# EAGLE board DualPanningMixer (EAGLE 9.5.2)
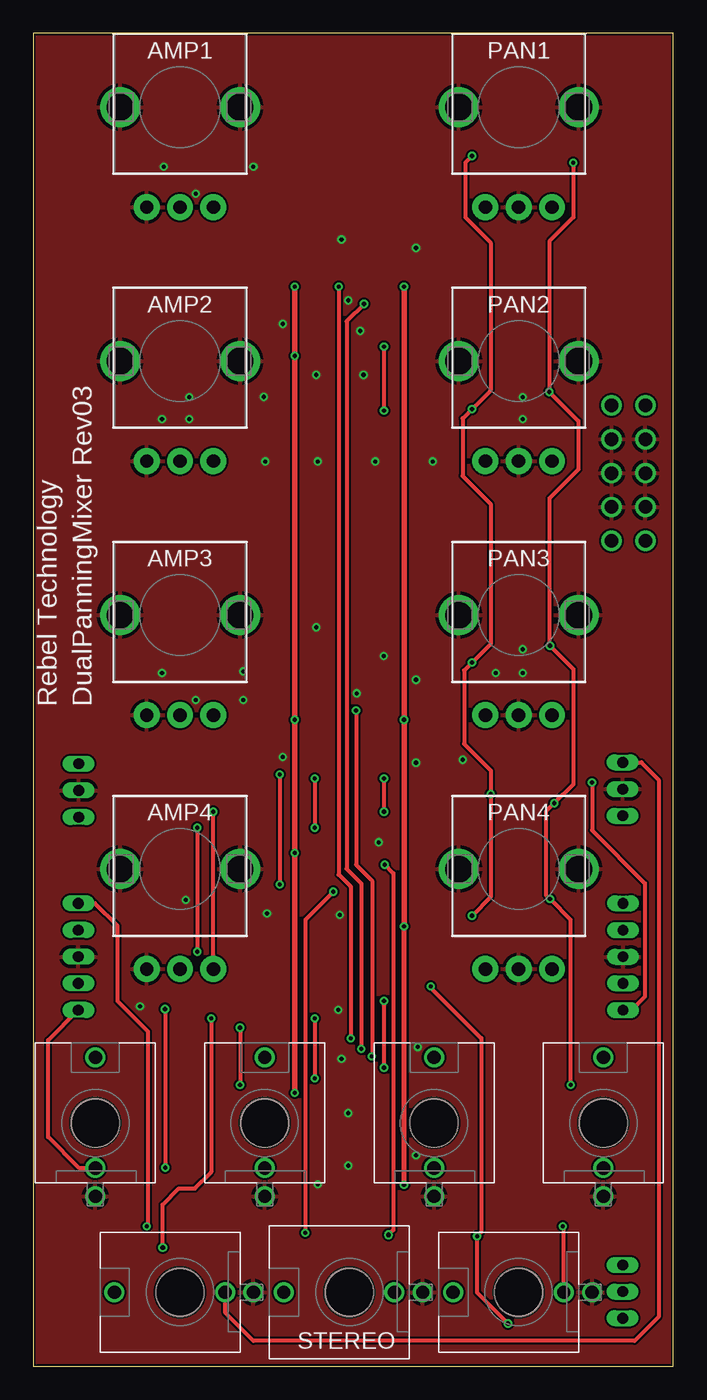
[diagram p0: board, top side]
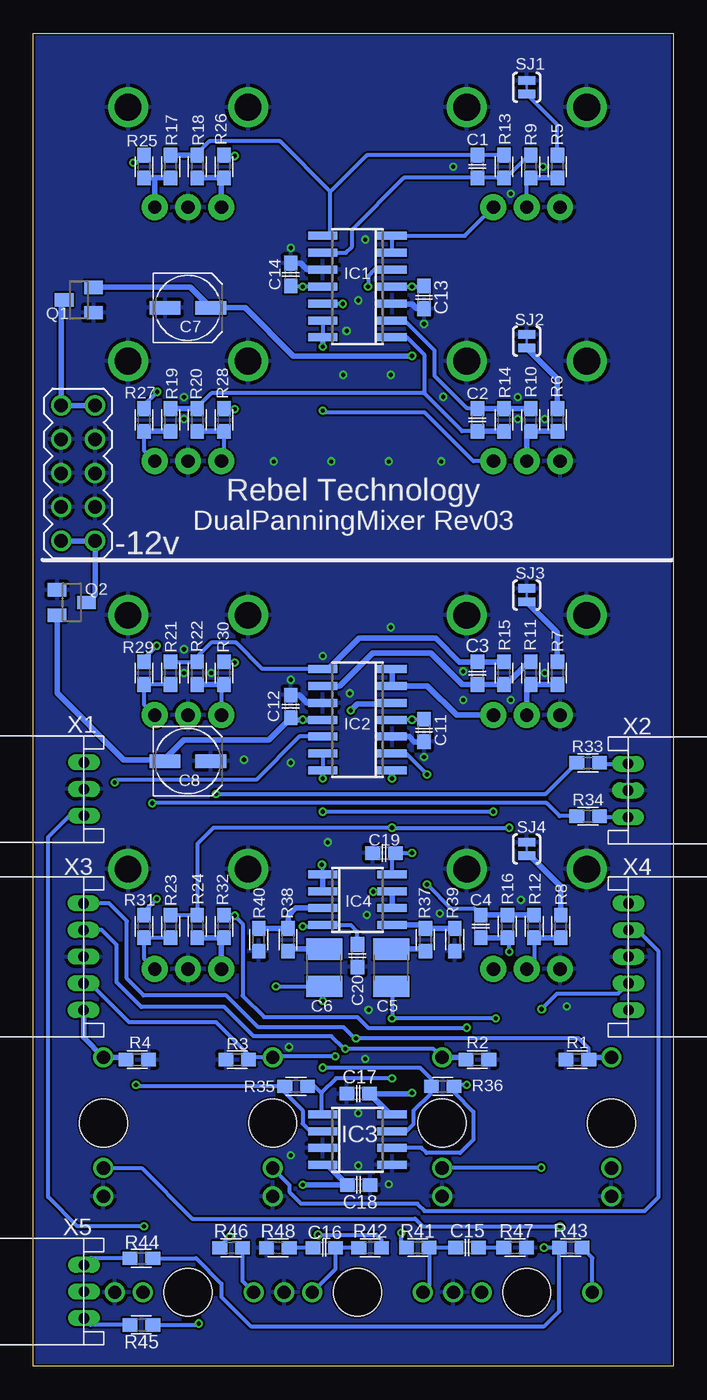
[diagram p1: board, bottom side, seen from below]

Size 48 x 100 mm. Coordinates in mm from the lower left corner, seen from the top.
Outline: 0,0 48,0 48,100 0,100 0,0
Copper layers (1*16): Top 0.035mm / dielectric 1.5mm / Bottom 0.035mm
Design rules "SparkFun-2-layer-PCBWay-LIMIT": minimum track width 6mil, minimum drill 0.3mm, track to track 6mil, track to pad 6mil, pad to pad 6mil, via to via 6mil, smd to smd 0mil, copper to edge 6mil, drill to drill 6mil, minimum pad ring 6mil, minimum via ring 6mil, stop-mask expansion 4mil, vias tented up to drill 25mil, thermal gap 10mil

## Footprints (pad centres in the part's own frame; a part is rotated, then mirrored left to right if it is on the bottom)
POT-ALPS-RK09L1140 = drill 1 pad 1.93: 1 -2.5,-7.5; 2 0,-7.5; 3 2.5,-7.5 | drill 2: P$5 -4.5,0; P$6 4.5,0
C0603 = smd 1.1 x 1: 1 -0.85,0; 2 0.85,0
C1210 = smd 1.6 x 2.7: 1 -1.4,0; 2 1.4,0
UD-5X5,8_NICHICON = smd 2.3 x 1: + 1.725,0; - -1.7,0
SO14 = smd 0.6 x 2.2: 1 -3.81,-2.6; 2 -2.54,-2.6; 3 -1.27,-2.6; 4 0,-2.6; 5 1.27,-2.6; 6 2.54,-2.6; 7 3.81,-2.6; 8 3.81,2.6; 9 2.54,2.6; 10 1.27,2.6; 11 0,2.6; 12 -1.27,2.6; 13 -2.54,2.6; 14 -3.81,2.6
SO08 = smd 0.6 x 2.2: 1 -1.905,-2.6; 2 -0.635,-2.6; 3 0.635,-2.6; 4 1.905,-2.6; 5 1.905,2.6; 6 0.635,2.6; 7 -0.635,2.6; 8 -1.905,2.6
THONKICONN = drill 1: P$1 0,-5.5; P$2 0,-3.38; P$3 0,4.92 | hole 3.6: 0,0
THONKICONN_STEREO = drill 1: P$1 0,-5.5; P$2 0,-3.38; P$3 0,4.92 | hole 3.6: 0,0
SOT23 = smd 1 x 1.4: 1 -0.95,-1.1; 2 0.95,-1.1; 3 0,1.1
0603 = smd 1.1 x 1: 1 -0.85,0; 2 0.85,0
SJ_2S-TRACE = smd 0.635 x 1.27: 1 -0.508,0; 2 0.508,0
MA05-2 = drill 1.016: 1 -5.08,-1.27; 2 -5.08,1.27; 3 -2.54,-1.27; 4 -2.54,1.27; 5 0,-1.27; 6 0,1.27; 7 2.54,-1.27; 8 2.54,1.27; 9 5.08,-1.27; 10 5.08,1.27
CON-JST_PH_3W = drill 0.8 long: P1 0,0; P2 -2,0; P3 -4,0
CON-JST_PH_5W = drill 0.8 long: P1 0,0; P2 -2,0; P3 -4,0; P4 -6,0; P5 -8,0

## Placement (x,y rotation side)
AMP1  POT-ALPS-RK09L1140  [POT-ALPS-RK09L1140]  11,94.45 0 top
AMP2  POT-ALPS-RK09L1140  [POT-ALPS-RK09L1140]  11,75.4 0 top
AMP3  POT-ALPS-RK09L1140  [POT-ALPS-RK09L1140]  11,56.35 0 top
AMP4  POT-ALPS-RK09L1140  [POT-ALPS-RK09L1140]  11,37.3 0 top
C1  10p  [C0603]  14.7,90 270 bottom
C2  10p  [C0603]  14.7,71 90 bottom
C3  10p  [C0603]  14.7,52 270 bottom
C4  10p  [C0603]  14.45,33 90 bottom
C5  1u Polyester  [C1210]  21.17,29.9 90 bottom
C6  1u Polyester  [C1210]  26.2,29.9 90 bottom
C7  47u  [UD-5X5,8_NICHICON]  36.42,79.4 0 bottom
C8  47u  [UD-5X5,8_NICHICON]  36.42,45.4 0 bottom
C11  100n  [C0603]  18.7,47.7 90 bottom
C12  100n  [C0603]  28.7,49.5 270 bottom
C13  100n  [C0603]  18.7,80.2 90 bottom
C14  100n  [C0603]  28.7,81.9 270 bottom
C15  47n  [C0603]  15.46,8.9 0 bottom
C16  47n  [C0603]  26.18,8.88 180 bottom
C17  100n  [C0603]  23.63,20.45 0 bottom
C18  100n  [C0603]  23.6,13.6 180 bottom
C19  100n  [C0603]  21.7,38.5 180 bottom
C20  100n  [C0603]  23.7,30.8 270 bottom
IC1  TL074  [SO14]  23.7,81 90 bottom
IC2  TL074  [SO14]  23.7,48.5 90 bottom
IC3  TL072  [SO08]  23.7,17 270 bottom
IC4  OPA1678  [SO08]  23.7,35 270 bottom
IN1  THONKICONN  [THONKICONN]  4.65,18.25 0 top
IN2  THONKICONN  [THONKICONN]  17.35,18.25 0 top
IN3  THONKICONN  [THONKICONN]  30.05,18.25 0 top
IN4  THONKICONN  [THONKICONN]  42.75,18.25 0 top
OUTHP  THONKICONN_STEREO  [THONKICONN_STEREO]  23.7,5.55 90 top
OUTL  THONKICONN  [THONKICONN]  11,5.55 90 top
OUTR  THONKICONN  [THONKICONN]  36.4,5.55 90 top
PAN1  POT-ALPS-RK09L1140  [POT-ALPS-RK09L1140]  36.4,94.45 0 top
PAN2  POT-ALPS-RK09L1140  [POT-ALPS-RK09L1140]  36.4,75.4 0 top
PAN3  POT-ALPS-RK09L1140  [POT-ALPS-RK09L1140]  36.4,56.35 0 top
PAN4  POT-ALPS-RK09L1140  [POT-ALPS-RK09L1140]  36.4,37.3 0 top
Q1  BSS84  [SOT23]  44.58,80 90 bottom
Q2  BSS123  [SOT23]  45.12,57.3 270 bottom
R1  1M  [0603]  7.2,23 0 bottom
R2  1M  [0603]  14.7,23 180 bottom
R3  1M  [0603]  32.7,23 0 bottom
R4  1M  [0603]  40.2,23 180 bottom
R5  2k7  [0603]  8.7,90 270 bottom
R6  2k7  [0603]  8.7,71 270 bottom
R7  2k7  [0603]  8.7,52 270 bottom
R8  2k7  [0603]  8.45,33 270 bottom
R9  10k  [0603]  10.7,90 90 bottom
R10  10k  [0603]  10.7,71 90 bottom
R11  10k  [0603]  10.7,52 90 bottom
R12  10k  [0603]  10.45,33 90 bottom
R13  22k  [0603]  12.7,90 90 bottom
R14  22k  [0603]  12.7,71 270 bottom
R15  22k  [0603]  12.7,52 90 bottom
R16  22k  [0603]  12.45,33 270 bottom
R17  10k  [0603]  37.7,90 90 bottom
R18  10k  [0603]  35.7,90 90 bottom
R19  10k  [0603]  37.7,71 90 bottom
R20  10k  [0603]  35.7,71 90 bottom
R21  10k  [0603]  37.7,52 90 bottom
R22  10k  [0603]  35.7,52 90 bottom
R23  10k  [0603]  37.7,33 90 bottom
R24  10k  [0603]  35.7,33 90 bottom
R25  10k  [0603]  39.7,90 270 bottom
R26  10k  [0603]  33.7,90 270 bottom
R27  10k  [0603]  39.7,71 270 bottom
R28  10k  [0603]  33.7,71 270 bottom
R29  10k  [0603]  39.7,52 270 bottom
R30  10k  [0603]  33.7,52 270 bottom
R31  10k  [0603]  39.7,33 270 bottom
R32  10k  [0603]  33.7,33 270 bottom
R33  18k  [0603]  6.4,45.26 180 bottom
R34  18k  [0603]  6.4,41.26 180 bottom
R35  22k  [0603]  28.3,21 0 bottom
R36  22k  [0603]  17.3,21 180 bottom
R37  2k  [0603]  18.6,32 270 bottom
R38  2k  [0603]  28.9,32 270 bottom
R39  1k  [0603]  16.4,32 90 bottom
R40  1k  [0603]  31.1,32 90 bottom
R41  10R  [0603]  19.16,8.9 180 bottom
R42  10R  [0603]  22.74,8.88 0 bottom
R43  100R  [0603]  7.7,8.9 0 bottom
R44  100R  [0603]  39.9,8.1 180 bottom
R45  100R  [0603]  39.9,3.1 180 bottom
R46  100R  [0603]  33.17,8.88 0 bottom
R47  10R  [0603]  11.87,8.9 180 bottom
R48  10R  [0603]  29.66,8.88 0 bottom
SJ1  SOLDERJUMPERTRACE  [SJ_2S-TRACE]  11,95.95 270 bottom
SJ2  SOLDERJUMPERTRACE  [SJ_2S-TRACE]  11,76.9 270 bottom
SJ3  SOLDERJUMPERTRACE  [SJ_2S-TRACE]  11,57.85 270 bottom
SJ4  SOLDERJUMPERTRACE  [SJ_2S-TRACE]  11,38.8 270 bottom
SV1  [MA05-2]  44.64,67 90 bottom
X1  CON-JST_PH_3W  [CON-JST_PH_3W]  44.2,45.3 90 bottom
X2  CON-JST_PH_3W  [CON-JST_PH_3W]  3.4,41.2 270 bottom
X3  CON-JST_PH_5W  [CON-JST_PH_5W]  44.23,34.72 90 bottom
X4  CON-JST_PH_5W  [CON-JST_PH_5W]  3.37,26.72 270 bottom
X5  CON-JST_PH_3W  [CON-JST_PH_3W]  44.2,7.6 90 bottom

## Library data of the parts
AMP1-AMP4 C1-C8 C11-C20 IC1-IC4 IN1-IN4 OUTHP OUTL OUTR PAN1-PAN4 R1-R48 X1-X5 = Rebel
Q1 Q2 = transistor-small-signal
SJ1-SJ4 = SparkFun
SV1 = Rebel; OC_FARNELL: unknown; OC_NEWARK: unknown

## Nets
+12V: C7.+ C11.2 C13.2 C17.2 C19.1 IC1.4 IC2.4 IC3.8 IC4.8 Q1.2
-12V: C8.- C12.2 C14.2 C18.2 C20.1 IC1.11 IC2.11 IC3.4 IC4.4 Q2.2
GND: AMP1.1 AMP1.P$5 AMP1.P$6 AMP2.1 AMP2.P$5 AMP2.P$6 AMP3.1 AMP3.P$5 AMP3.P$6 AMP4.1 AMP4.P$5 AMP4.P$6 C7.- C8.+ C11.1 C12.1 C13.1 C14.1 C17.1 C18.1 C19.2 C20.2 IC1.3 IC1.10 IC2.3 IC2.10 IC3.3 IC3.5 IN1.P$1 IN2.P$1 IN3.P$1 IN4.P$1 OUTHP.P$1 OUTL.P$1 OUTR.P$1 PAN1.2 PAN1.P$5 PAN1.P$6 PAN2.2 PAN2.P$5 PAN2.P$6 PAN3.2 PAN3.P$5 PAN3.P$6 PAN4.2 PAN4.P$5 PAN4.P$6 Q1.1 Q2.1 R1.1 R2.1 R3.1 R4.1 R39.1 R40.1 R47.1 R48.1 SJ1.1 SJ2.1 SJ3.1 SJ4.1 SV1.3 SV1.4 SV1.5 SV1.6 SV1.7 SV1.8 X1.P2 X2.P2 X3.P3 X4.P3
L_OUT: C15.1 OUTHP.P$3 R41.1
LAB: IC3.2 R25.1 R27.1 R29.1 R31.1 R34.2 R35.1
MONO1: AMP1.3 IC1.6 IC1.7
MONO1_F: IC1.5 IN1.P$3 R1.2 X3.P1
MONO2: AMP2.3 IC1.13 IC1.14
MONO2_F: IC1.12 IN2.P$3 R2.2 X3.P2
MONO3: AMP3.3 IC2.6 IC2.7
MONO3_F: IC2.5 IN3.P$3 R3.2 X3.P4
MONO4: AMP4.3 IC2.13 IC2.14
MONO4_F: IC2.12 IN4.P$3 R4.2 X3.P5
N$1: AMP4.2 R8.2 R12.1
N$2: IN2.P$2 X4.P2
N$3: C5.1 IC3.1 R35.2 R43.1 R44.1
N$4: IN1.P$2 X4.P1
N$5: C6.1 IC3.7 R36.2 R45.1 R46.1
N$6: IN3.P$2 X4.P4
N$7: IC4.3 R38.1 R40.2
N$8: AMP1.2 R5.2 R9.1
N$9: C1.2 IC1.9 R9.2 R13.1
N$10: AMP3.2 R7.2 R11.1
N$11: AMP2.2 R6.2 R10.1
N$12: R5.1 SJ1.2
N$13: IC4.5 R37.1 R39.2
N$14: R33.1 X2.P3
N$15: IN4.P$2 X4.P5
N$16: R6.1 SJ2.2
N$17: PAN1.1 R18.1 R26.2
N$19: PAN1.3 R17.1 R25.2
N$20: R7.1 SJ3.2
N$21: R8.1 SJ4.2
N$23: C1.1 IC1.8 R13.2 R17.2 R18.2
N$24: R34.1 X2.P1
N$25: C4.1 IC2.1 R16.2 R23.2 R24.2
N$26: C2.1 IC1.1 R14.2 R19.2 R20.2
N$33: PAN2.3 R19.1 R27.2
N$34: OUTL.P$3 R43.2
N$35: PAN2.1 R20.1 R28.2
N$36: PAN3.3 R21.1 R29.2
N$37: C3.1 IC2.8 R15.2 R21.2 R22.2
N$38: PAN3.1 R22.1 R30.2
N$39: PAN4.3 R23.1 R31.2
N$40: OUTR.P$3 R46.2
N$41: PAN4.1 R24.1 R32.2
N$42: C16.2 R48.2
N$43: C2.2 IC1.2 R10.2 R14.1
N$44: Q2.3 SV1.1 SV1.2
N$45: C3.2 IC2.9 R11.2 R15.1
N$46: Q1.3 SV1.9 SV1.10
N$47: C4.2 IC2.2 R12.2 R16.1
N$48: C15.2 R47.2
N$49: C5.2 R37.2
N$52: IC4.6 IC4.7 R41.2
N$53: IC4.1 IC4.2 R42.2
N$54: C6.2 R38.2
OUT_NS_L: R44.2 X5.P1
OUT_NS_R: R45.2 X5.P3
OUT_SW_L: OUTL.P$2 X1.P1
OUT_SW_R: OUTR.P$2 X1.P3
R_OUT: C16.1 OUTHP.P$2 R42.1
RAB: IC3.6 R26.1 R28.1 R30.1 R32.1 R33.2 R36.1

## Tracks (layer width: path | path; a pad name or v marks a point on that pad's centre or on a via)
+12V  (via drill 0.3)
  Top 0.406: v19.6,20.5 v19.6,38.5 v19.6,48.5 v19.6,75.8 v19.6,81
  Bottom 0.305: IC4.8 21.1,38.25 C19.1 v19.6,38.5 | IC2.4 v19.6,48.5 18.85,48.5 18.8,48.55 C11.2 | IC1.4 v19.6,81 18.75,81 C13.2
  Bottom 0.406: v19.6,20.5 19.65,20.45 C17.2 21.23,18.91 IC3.8 | v19.6,75.8 28.5,75.8 32.1,79.4 C7.+ 36.24,80.95 Q1.2
-12V  (via drill 0.3)
  Top 0.39: v27.8,13.6 v27.8,33
  Top 0.406: v27.8,33 v27.8,48.5 v27.8,81
  Bottom 0.305: IC1.11 v27.8,81 28.75,81 C14.2 | v27.8,33 26.39,33 IC4.4 24.2,33.09 23.7,32.6 C20.1
  Bottom 0.406: IC2.11 v27.8,48.5 28.55,48.5 C12.2 30.35,47 36.7,47 38.12,45.58 38.12,45.5 | v27.8,13.6 C18.2 25.95,15.1 IC3.4 | Q2.2 46.22,50.52 41.2,45.5 38.12,45.5 | 38.12,45.5 C8.-
GND  (via drill 0.3)
  Bottom 0.406: IC2.10 27.47,49.77 28.05,50.35 C12.1 | C11.1 19.43,46.85 19.81,47.23 IC2.3 | C13.1 19.25,79.35 19.6,79.7 21.07,79.7 IC1.3 | IC1.10 27.47,82.27 27.95,82.75 C14.1
  other vias: 32.2,45.5 28.7,51.5 18.7,45.7 18.7,78.2 28.7,83.9 34.67,52.01 36.7,52.01 36.7,53.79 36.7,72.71 36.7,71.06 29.97,67.88 25.65,67.88 21.33,67.88 17.4,67.88 11.68,71.06 11.68,72.71 9.65,71.06 9.65,52.01 12.19,49.98 24.25,50.48 28.7,45.28 25.91,39.31 23.11,84.53 16.51,90 9.78,90 12.19,87.96 23.62,79.96 24.51,77.68 21.21,74.38 24.76,74.38 17.27,72.72 11.43,34.99 23.11,23.05 23.62,18.99 23.62,15.05 28.83,23.94 22.98,33.85 22.86,26.73 15.75,52.13 21.21,55.44 26.29,53.28 15.75,49.98 17.52,33.97 8,26.99 28.7,15.81 21.33,13.65
  pour Bottom: 49.7,-1 -2.3,-1 -2.3,101 49.7,101
  pour Top: 50.9,-1 -1.1,-1 -1.1,101 50.9,101
L_OUT
  Bottom 0.305: C15.1 R41.1 18.32,6.01 OUTHP.P$3
LAB  (via drill 0.3)
  Top 0.305: v40.5,90.3 40.5,86.2 38.7,84.4 v38.7,73.1 40.88,70.92 40.88,67.28 38.7,65.1 38.7,54.1 v38.75,54.05 40.5,52.3 40.5,43.66 v39.08,42.24 38.45,41.6 38.45,35.35 v38.75,35.05 40.3,33.5 v40.3,21.1
  Bottom 0.305: IC3.2 26.36,17.7 27.3,17.7 27.8,18.2 27.8,19.2 29.15,20.55 R35.1 40.2,21 v40.3,21.1 | R29.1 39.7,53.1 v38.75,54.05 | R27.1 39.7,72.1 v38.7,73.1 | v40.5,90.3 40.25,90.3 R25.1 | R31.1 39.7,34.1 v38.75,35.05 | R34.2 8.52,41.26 9.49,42.24 v39.08,42.24
MONO1
  Bottom 0.305: IC1.6 IC1.7 15.64,84.81 AMP1.3
MONO1_F  (via drill 0.3)
  Top 0.305: v22.9,81 22.9,36.88 23.8,35.98 v23.8,24.6
  Bottom 0.305: R1.2 6.35,23.85 7.1,24.6 v23.8,24.6 23.9,24.6 24.73,25.43 31.13,25.43 33.51,27.81 39.72,27.81 40.99,29.08 40.99,33.4 42.31,34.72 X3.P1 | IC1.5 22.43,82.27 22.9,81.8 v22.9,81
  Bottom 0.406: R1.2 6.18,23.17 IN1.P$3
MONO2  (via drill 0.3)
  Top 0.305: v26.3,71.69 v26.3,76.5
  Bottom 0.305: IC1.13 IC1.14 | AMP2.3 15,67.9 18.66,71.56 26.17,71.56 v26.3,71.69
  Bottom 0.406: v26.3,76.5 IC1.14
MONO2_F  (via drill 0.3)
  Top 0.305: v24.8,79.7 23.5,78.4 23.5,37.31 24.6,36.21 v24.6,23.8
  Bottom 0.305: IN2.P$3 17.37,23.17 18,23.8 v24.6,23.8 24.7,23.8 25.65,24.75 31.47,24.75 33.67,26.95 39.9,26.95 41.75,28.81 41.75,31.62 42.85,32.72 X3.P2 | IC1.12 24.83,79.73 v24.8,79.7
  Bottom 0.406: IN2.P$3 15.55,23.17 R2.2
MONO3
  Bottom 0.406: IC2.7 IC2.6 18.44,51.04 16.25,48.85 AMP3.3
MONO3_F  (via drill 0.3)
  Top 0.305: v24.2,49.2 24.2,37.61 25.4,36.41 25.4,23.27 v25.37,23.24
  Bottom 0.305: IC2.5 21.1,49.7 | v25.37,23.24 29.98,23.24 IN3.P$3 30.08,23.2 31.65,23.2 R3.2 31.85,23.35 34.3,25.8 40.8,25.8 43.72,28.72 X3.P4
  Bottom 0.406: 21.1,49.7 23.7,49.7 v24.2,49.2
MONO4  (via drill 0.3)
  Top 0.305: AMP4.3 v13.5,41.6 | v26.3,41.6 v26.3,44.1
  Bottom 0.305: IC2.13 IC2.14 v26.3,44.1 | v13.5,41.6 v26.3,41.6
MONO4_F  (via drill 0.3)
  Top 0.305: v41.9,43.8 41.9,40.2 45.86,36.24 45.86,27.72 44.87,26.72 X3.P5
  Bottom 0.305: IC2.12 28.07,47.23 31.3,44 41.7,44 v41.9,43.8
  Bottom 0.406: R4.2 41.22,23.17 IN4.P$3 44.23,24.65 X3.P5
N$1
  Bottom 0.305: R12.1 10.45,30.35 AMP4.2
  Bottom 0.406: R8.2 R12.1
N$2  (via drill 0.3, 0.35)
  Top 0.305: v9.88,26.8 9.9,26.77 v9.9,14.9
  Bottom 0.305: v9.9,14.9 17.32,14.9 IN2.P$2 | X4.P2 4.15,27.94 8.73,27.94 v9.88,26.8
N$3  (via drill 0.3, 0.35)
  Top 0.305: v21.1,26.1 v21.1,21.6 | v13.33,26.1 13.33,14.55 12.11,13.34 10.92,13.34 9.7,12.12 v9.7,8.9
  Bottom 0.305: C5.1 21.1,28.43 v21.1,26.1 v13.33,26.1 | R35.2 26.9,21 26.4,20.5 | 26.4,20.5 26.4,19 IC3.1 | v21.1,21.6 25.3,21.6 26.4,20.5 | R44.1 35.8,8.1 33.9,6.2 33.9,5.2 31.7,3 9.67,3 8.55,4.12 R43.1 v9.7,8.9
N$4
  Top 0.305: IN1.P$2 4.62,14.9 3.4,14.9 1.1,17.2 1.1,24.45 X4.P1
N$5  (via drill 0.3)
  Top 0.305: v29.8,28.5 29.8,28.4 33.6,24.6 33.6,10.07 v33.28,9.75 33.28,5.52 v35.6,3.2 | v26.3,22.4 v26.3,27.4
  Bottom 0.305: IC3.7 20.04,17.64 19.47,18.2 19.47,19.18 18.2,20.45 18.2,20.95 R36.2 18.15,21.55 19,22.4 v26.3,22.4 | v33.28,9.75 34.02,9.01 R46.1 | v29.8,28.5 C6.1 26.3,28.4 v26.3,27.4 | R45.1 35.7,3.1 v35.6,3.2
N$6
  Bottom 0.305: IN3.P$2 30.05,14.85 28.8,13.6 28.8,13.1 27.9,12.2 19.2,12.2 18.65,11.65 2.15,11.65 1.1,12.7 1.1,31.1 2.72,32.72 X4.P4
N$7
  Bottom 0.406: IC4.3 28.34,34.37 28.9,33.8 R38.1 R40.2
N$8
  Bottom 0.305: AMP1.2 11,88.85 R9.1
  Bottom 0.406: R5.2 R9.1
N$9
  Bottom 0.305: IC1.9 24.56,83.54 24.1,84 24.1,85.26 20.21,89.15 C1.2 R13.1 12.55,89.15 10.85,90.85 R9.2
N$10
  Bottom 0.406: R7.2 R11.1 arc90 11,50.95 AMP3.2
N$11
  Bottom 0.406: R6.2 R10.1 arc90 11,69.95 AMP2.2
N$12
  Bottom 0.305: R5.1 8.7,93.14 SJ1.2
N$13
  Bottom 0.406: IC4.5 18.84,33.09 R37.1 R39.2
N$14
  Bottom 0.305: R33.1 5.49,45.2 X2.P3
N$15  (via drill 0.3)
  Top 0.305: v8.5,10.5 8.6,10.6 8.6,25.1 6.32,27.38 6.32,33.02 4.62,34.72 X4.P5
  Bottom 0.305: v8.5,10.5 18.8,10.5 19.37,11.07 36.07,11.07 39.87,14.87 IN4.P$2
N$16
  Bottom 0.406: R6.1 8.7,74.09 SJ2.2
N$17
  Bottom 0.406: PAN1.1 33.9,89.15 R26.2 R18.1
N$19
  Bottom 0.406: R17.1 R25.2 38.9,89.15 PAN1.3
N$20
  Bottom 0.406: SJ3.2 8.7,55.04 R7.1
N$21
  Bottom 0.406: R8.1 8.45,35.99 10.75,38.29 SJ4.2
N$23
  Bottom 0.305: 25.72,88.13 29.49,91.9 34.8,91.9 35.7,91 R18.2 | 25.72,88.13 25.72,84.81 IC1.8 | R13.2 C1.1 22.99,90.85 25.72,88.13
  Bottom 0.406: R18.2 R17.2
N$24
  Bottom 0.305: R34.1 5.49,41.2 X2.P1
N$25  (via drill 0.3)
  Top 0.305: v21.1,44.1 v21.1,40.4 | v12.3,40.4 v12.3,31.1
  Bottom 0.305: R23.2 R24.2 35.7,39.2 34.5,40.4 v21.1,40.4 v12.3,40.4 | v21.1,44.1 IC2.1 | v12.3,31.1 12.3,32 R16.2
  Bottom 0.406: R16.2 C4.1
N$26
  Bottom 0.305: 18.7,73 34.64,73 35.7,71.94 R20.2 | C2.1 15.85,70.15 18.7,73 | IC1.1 19.99,77.19 18.7,75.9 18.7,73
  Bottom 0.406: R14.2 C2.1 | R19.2 R20.2
N$33
  Bottom 0.305: R27.2 39.7,68.7 PAN2.3
  Bottom 0.406: R19.1 R27.2
N$34
  Bottom 0.305: OUTL.P$3 6.08,8.13 R43.2
N$35
  Bottom 0.305: R28.2 33.7,68.1 PAN2.1
  Bottom 0.406: R20.1 R28.2
N$36
  Bottom 0.305: R21.1 R29.2 39.7,49.65 PAN3.3
N$37
  Bottom 0.305: R21.2 R22.2 35.7,53.25 34.67,54.28 32.8,54.28 30.83,52.31 IC2.8
  Bottom 0.406: R15.2 C3.1 16.05,52.85 17.83,54.63 23.57,54.63 25.89,52.31 IC2.8
N$38
  Bottom 0.305: R30.2 33.9,50.95 PAN3.1
  Bottom 0.406: R22.1 R30.2
N$39
  Bottom 0.305: R23.1 R31.2 39.7,30.6 PAN4.3
N$40
  Bottom 0.305: OUTR.P$3 32.32,6.39 R46.2
N$41
  Bottom 0.406: PAN4.1 33.9,32.15 R32.2 R24.1
N$42
  Bottom 0.305: C16.2 R48.2
N$43
  Bottom 0.305: C2.2 15.45,71.85 17.9,74.3 17.9,76.2 20.1,78.4 21.04,78.4
  Bottom 0.406: R10.2 R14.1 C2.2 | 21.04,78.4 IC1.2
N$44
  Bottom 0.305: Q2.3 43.97,57.3
  Bottom 0.406: SV1.2 SV1.1 43.37,57.9 43.97,57.3
N$45
  Bottom 0.406: IC2.9 25.01,51.04 22.55,53.5 18.2,53.5 15.85,51.15 C3.2 R15.1 12.55,51.15 10.85,52.85 R11.2
N$46
  Bottom 0.406: Q1.3 45.91,79.77 SV1.10 SV1.9
N$47  (via drill 0.3)
  Top 0.305: v18.47,44.4 v18.47,36.15
  Bottom 0.305: IC2.2 20.03,45.96 v18.47,44.4 | v18.47,36.15 16.68,34.36 14.95,34.36 C4.2
  Bottom 0.406: R12.2 R16.1 C4.2
N$48
  Bottom 0.305: R47.2 C15.2
N$49
  Bottom 0.305: R37.2 18.75,31.3 18.8,31.3
  Bottom 0.406: 18.8,31.3 C5.2
N$52  (via drill 0.3)
  Top 0.305: v22.5,35.6 20.4,33.5 v20.4,10
  Bottom 0.305: IC4.7 22.46,35.63 v22.5,35.6 | R41.2 20.4,9.29 v20.4,10
  Bottom 0.406: IC4.7 IC4.6
N$53  (via drill 0.3, 0.35)
  Top 0.305: v26.35,37.63 27,36.98 27,10.22 v26.64,9.86
  Bottom 0.305: v26.64,9.86 22.28,9.86 21.89,9.47 R42.2 | IC4.1 26.3,37.57 v26.35,37.63
  Bottom 0.406: IC4.1 IC4.2
N$54
  Bottom 0.406: C6.2 28.75,31.3 R38.2
OUT_NS_L
  Bottom 0.305: R44.2 43.7,8.1 X5.P1
OUT_NS_R
  Bottom 0.305: R45.2 43.7,3.1 X5.P3
OUT_SW_L
  Top 0.305: X1.P1 45.6,45.3 46.9,44 46.9,3.7 45.1,1.9 16.5,1.9 14.4,4 14.4,5.53 OUTL.P$2
OUT_SW_R  (via drill 0.3)
  Top 0.305: OUTR.P$2 39.78,10.42 v39.7,10.5
  Bottom 0.305: X1.P3 45.3,41.3 46.9,39.7 46.9,12.7 44.7,10.5 v39.7,10.5
R_OUT
  Bottom 0.305: R42.1 C16.1 25.33,7.3 OUTHP.P$2
RAB  (via drill 0.3)
  Top 0.305: v32.9,90.8 32.4,90.3 32.4,86.2 34.3,84.3 34.3,73.2 v32.9,71.8 32.2,71.1 32.2,66.8 34.3,64.7 34.3,54.2 v32.9,52.8 32.3,52.2 32.3,46.7 34.3,44.7 v34.3,42.94 34.3,35.2 v32.9,33.8 | v15.5,25.4 v15.5,21.1
  Bottom 0.305: R32.1 33.65,33.8 v32.9,33.8 32.3,33.2 32.3,27.8 30.7,26.2 23.7,26.2 22.9,25.4 v15.5,25.4 | v32.9,52.8 33.65,52.8 R30.1 | v32.9,71.8 33.65,71.8 R28.1 | v32.9,90.8 33.65,90.8 R26.1 | IC3.6 21.07,16.4 18.9,16.4 18.5,16 16,16 15,17 15,19.1 16.45,20.55 R36.1 16.35,21.1 v15.5,21.1 | R33.2 9.58,42.94 v34.3,42.94

## Text on the board
tPlace: Rebel Technology | DualPanningMixer Rev03 | STEREO
bPlace: Rebel Technology | DualPanningMixer Rev03 | -12v